# Altium PCB PCB1.PcbDoc
Units mil, origin at the board's own origin, x right, y up, seen from the top; angles counter-clockwise.
Board outline 3900 x 2800 mil, 2 copper layers (Top Layer, Bottom Layer), stack 65.792 mil thick; 55 components, 52 nets, 200 pads, 137 vias.
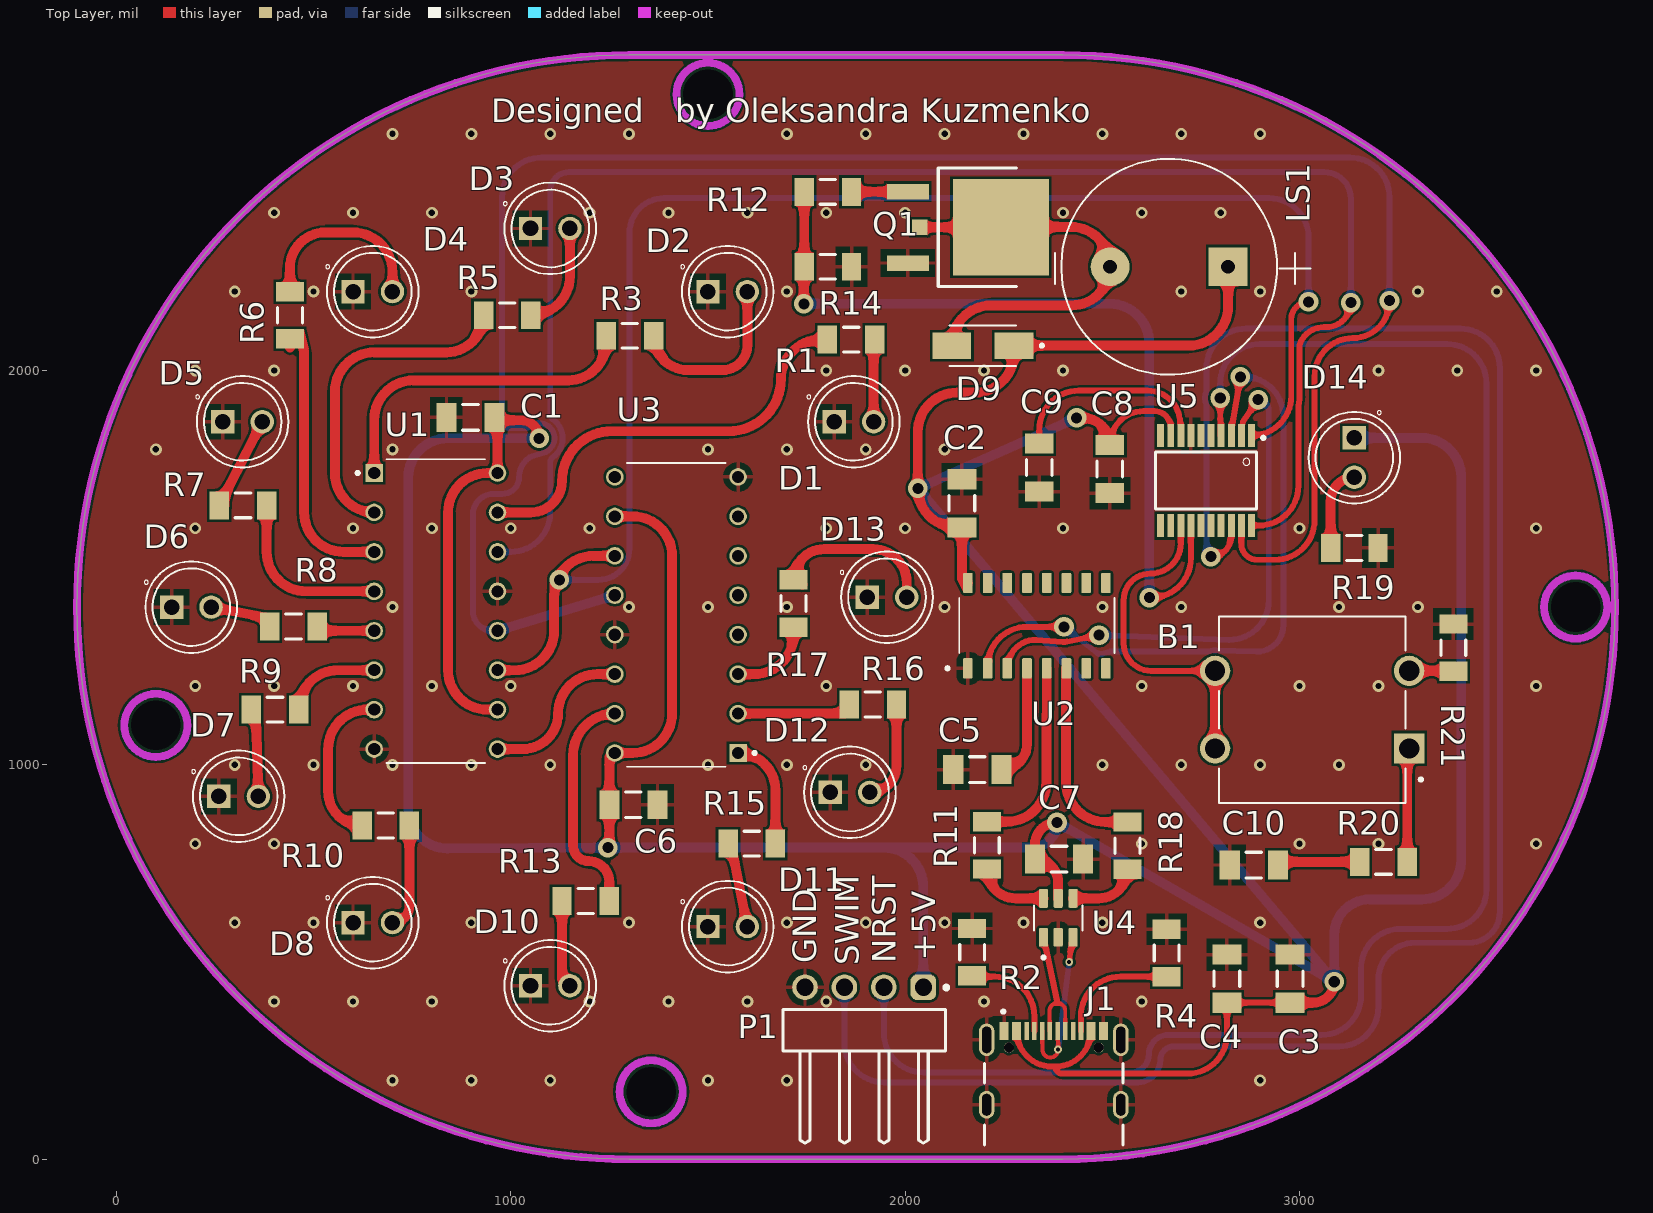
[diagram p0: Top Layer view]
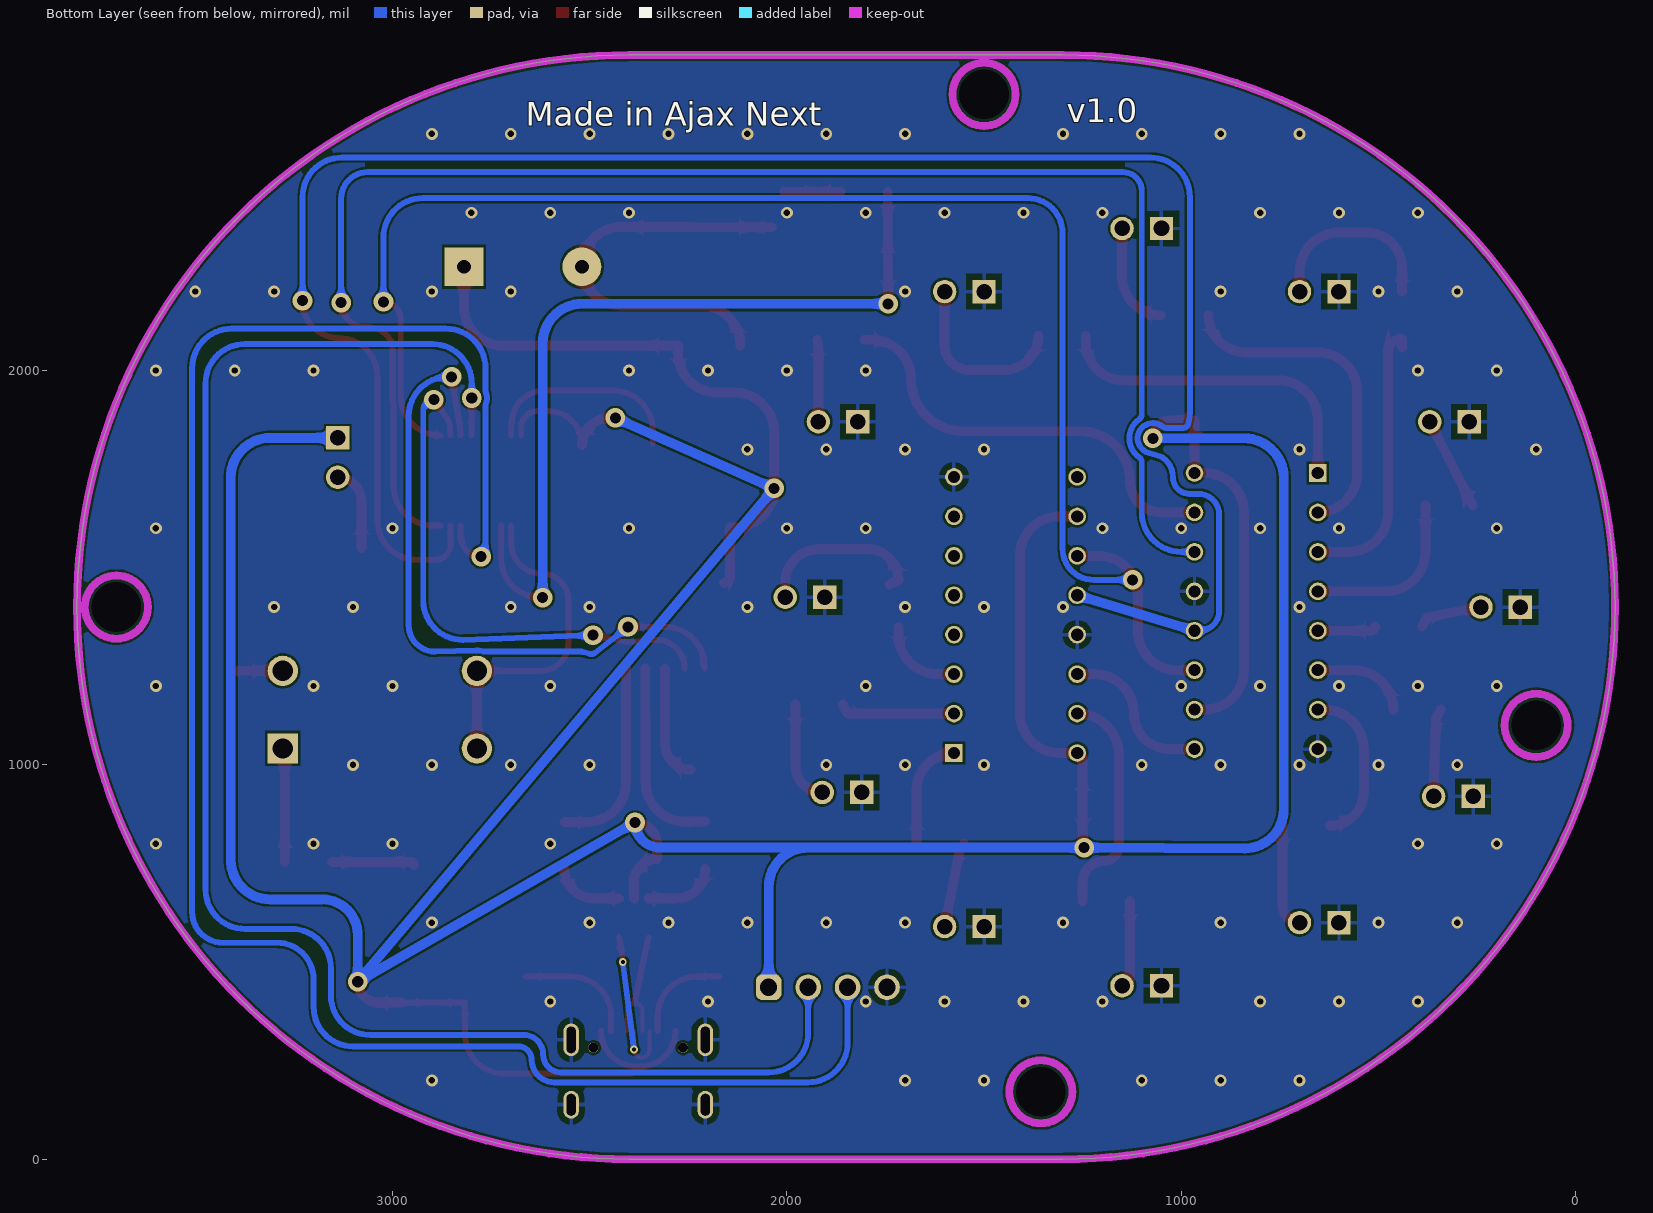
[diagram p1: Bottom Layer view, seen from below]
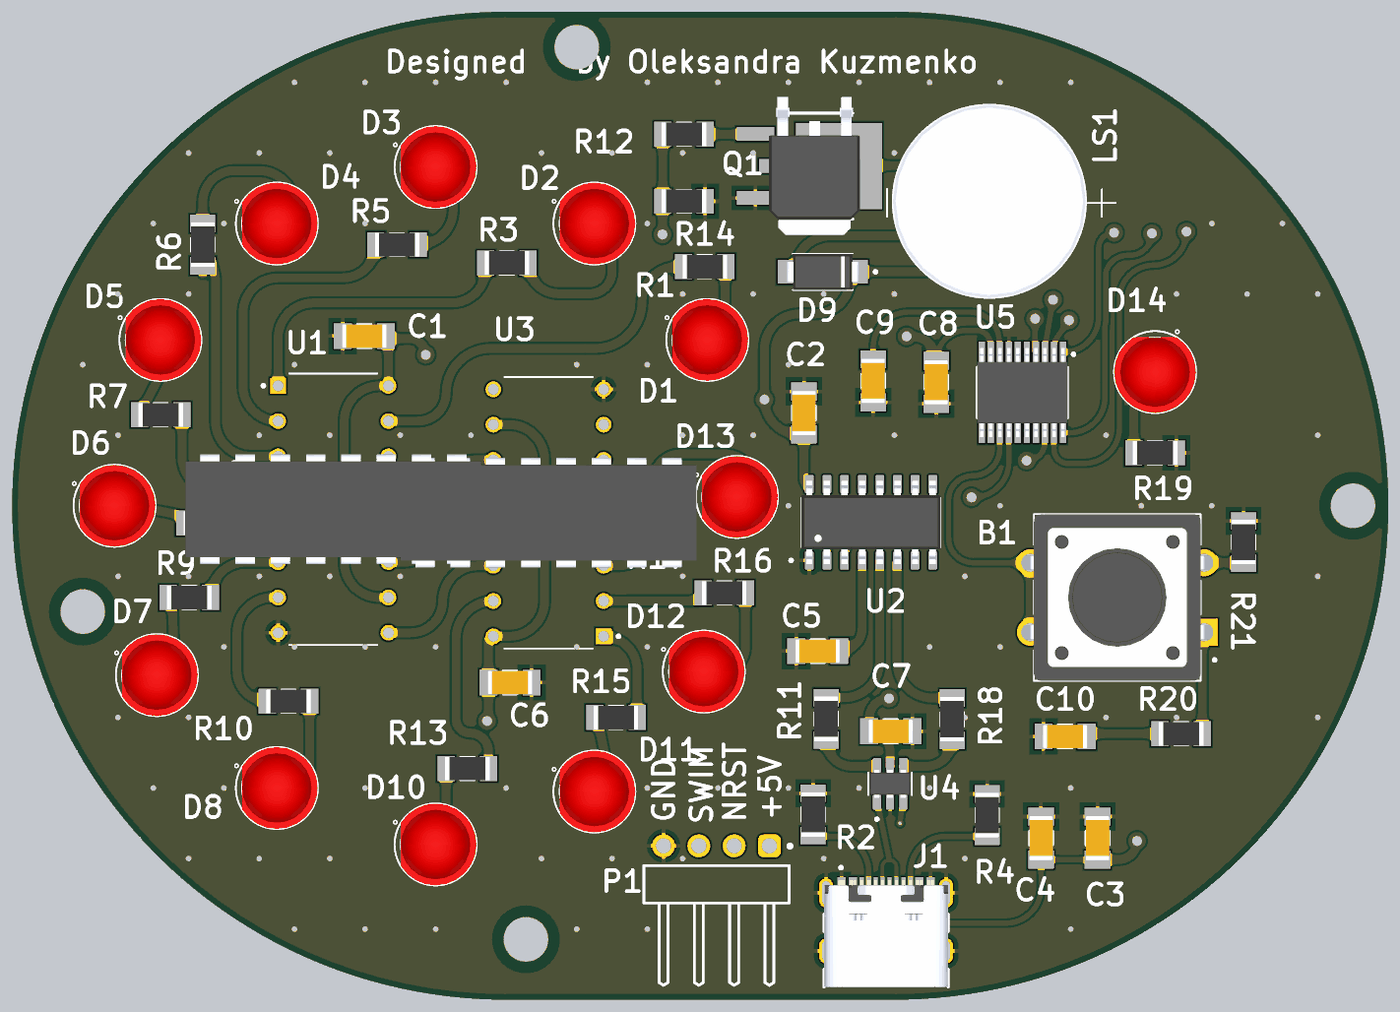
[diagram p2: 3D render of the assembled board from above, using the file's embedded part models]

## Layer stack, top to bottom
Top Solder: solder mask 0.4, Solder Resist, Dk 3.5
Top Layer: signal copper 1.4
Dielectric 1: dielectric 62.9921, FR-4, Dk 4.8
Bottom Layer: signal copper 1.4
Bottom Solder: solder mask 0.4, Solder Resist, Dk 3.5

## Board outline
1300,0 cw(c1300,1400) 1300,2800 2400,2800 cw(c2400,1400) 2400,0

## Design rules (kind name [scope] priority, off if disabled: settings)
Clearance [All] p1: gap=6 ignorepadtopadclearanceinfootprint=FALSE
DiffPairsRouting [All] p1: maxlimit=10 minlimit=10 mostfreqgap=10 toplayer_minwidth=15 toplayer_maxwidth=15 toplayer_prefwidth=15 bottomlayer_minwidth=15 bottomlayer_maxwidth=15 bottomlayer_prefwidth=15 maxuncoupledlength=500
HoleSize [All] p1: absolutevalues=TRUE maxlimit=200 minlimit=1 maxpercent=80.000 minpercent=20.000
MinimumSolderMaskSliver MinimumSolderMaskSliver_1 [HasFootprint('USB_Type_C') vs HasFootprint('USB_Type_C')] p1: minsoldermaskwidth=0
MinimumSolderMaskSliver [All] p2: minsoldermaskwidth=4
PolygonConnect [All] p1: connectstyle=Relief reliefconductorwidth=10 reliefentries=4 polygonreliefangle="90 Angle" airgapwidth=15
RoutingVias [All] p1: holewidth=28 width=50 viastyle="Through Hole" minholewidth=28 minwidth=50 maxholewidth=28 maxwidth=50
SilkToSilkClearance [All] p1: silktosilkclearance=6
SilkToSolderMaskClearance [IsPad] p1: minsilkscreentomaskgap=6 clearancetoexposedcopper=TRUE
SolderMaskExpansion [All] p1: expansion=4 istentingtop=FALSE
SupplyNets "Schematic Supply Nets_1" [InNet('+5V')] p1: voltage=0.000
SupplyNets "Schematic Supply Nets" [InNet('GND')] p2: voltage=0.000
Width [All] p1: maxlimit=100 minlimit=10 preferedwidth=50 minimp=50.000000 maximp=50.000000 favimp=50.000000
25 further rules are at their usual default settings.

## Classes and differential pairs
differential pair TypeC: +TypeC_P -TypeC_N
differential pair D: +D_P -D_N

## Components (designator, comment, footprint, x,y, rotation, side; value= is the part's Value field where it differs from the comment)
B1 "VS-1213-67-160GF" Button 3032,1140 r180 top
C1 "Cap_1206" Cap_1206 898,1881 r0 top value=100nF
C2 "Cap_1206" Cap_1206 2144,1663 r270 top value=100nF
C3 "Cap_1206" Cap_1206 2976,458 r270 top value=100nF
C4 "Cap_1206" Cap_1206 2816,458 r270 top value=1uF
C5 "Cap_1206" Cap_1206 2183,988 r0 top value=100nF
C6 "100nF" Cap_1206 1311,899 r180 top
C7 "Cap_1206" Cap_1206 2390,761 r180 top value=100nF
C8 "Cap_1206" Cap_1206 2519,1750 r90 top value=1uF
C9 "Cap_1206" Cap_1206 2340,1754 r90 top value=100nF
C10 "Cap_1206" Cap_1206 2884,746 r0 top value=100nF
D1 "Diode" Diode_Green 1870,1870 r0 top
D2 "Diode" Diode_Green 1550,2200 r0 top
D3 "Diode" Diode_Green 1100,2360 r0 top
D4 "Diode" Diode_Green 650,2200 r0 top
D5 "Diode" Diode_Green 320,1870 r0 top
D6 "Diode" Diode_Green 190,1400 r0 top
D7 "Diode" Diode_Green 310,920 r0 top
D8 "Diode" Diode_Green 650,600 r0 top
D9 "Diode standart" "Diode standart" 2197,2063 r180 top
D10 "Diode" Diode_Green 1100,440 r0 top
D11 "Diode" Diode_Green 1550,590 r0 top
D12 "Diode" Diode_Green 1860,930 r0 top
D13 "Diode" Diode_Green 1954,1425 r0 top
D14 "Diode" Diode_Green 3139,1779 r270 top
J1 "USB_Type_C" USB_Type_C 2376.78,138.12 r0 top
LS1 "Speaker" Speaker 2669.39,2263 r180 top
P1 "Conector_4pin" Conector_4pins 1896,327 r0 top
Q1 "IRLR2905TRPBF" IRLR2905TRPBF 2174,2363 r270 top
R1 "Res_1206" Res_1206 1863,2078 r0 top value=220Om
R2 "Res_1206" Res_1206 2170,525 r90 top value=5.1KOm
R3 "Res_1206" Res_1206 1302,2088 r0 top value=220Om
R4 "Res_1206" Res_1206 2663,523 r270 top value=5.1KOm
R5 "Res_1206" Res_1206 991,2140 r0 top value=220Om
R6 "Res_1206" Res_1206 440,2140 r90 top value=220Om
R7 "Res_1206" Res_1206 321,1658 r180 top value=220Om
R8 "Res_1206" Res_1206 449,1351 r180 top value=220Om
R9 "Res_1206" Res_1206 402,1140 r180 top value=220Om
R10 "Res_1206" Res_1206 683,846 r0 top value=220Om
R11 "Res_1206" Res_1206 2207,796 r270 top value=22Om
R12 "Res_1206" Res_1206 1804,2453 r180 top value=1KOmR12
R13 "Res_1206" Res_1206 1190,655 r180 top value=220Om
R14 "Res_1206" Res_1206 1804,2263 r180 top value=100KOm
R15 "Res_1206" Res_1206 1611,800 r180 top value=220Om
R16 "Res_1206" Res_1206 1918,1153 r0 top value=220Om
R17 "Res_1206" Res_1206 1717,1409 r90 top value=220Om
R18 "Res_1206" Res_1206 2564,795 r270 top value=22Om
R19 "Res_1206" Res_1206 3139,1550 r0 top value=2.2KOm
R20 "Res_1206" Res_1206 3213,754 r0 top value=10KOm
R21 "Res_1206" Res_1206 3390,1297 r270 top value=10KOm
U1 "SN74HC595N" SN74HC595N 810,1390 r0 top
U2 "CH340С" CH340С 2334,1353 r90 top
U3 "SN74HC595N" SN74HC595N 1420,1380 r180 top
U4 "USBLC6-2SC6" USBLC6-2SC6 2388,612 r90 top
U5 "STM8S103F3P6" SOP65P640X120-20N 2763,1721 r270 top

## Footprints (in the part's own frame and the unit in brackets; to place one, negate y for a bottom-side part, rotate by r counter-clockwise, add the part's x,y. Pads: shape width x height; smd on the part's side, far side on the other; paste and mask are expansions set on the pad)
Button [mm] "12*12mm"
  rect 1.95x1.95 / inner round 1.95 / far side rect 1.95x1.95 hole 1.3: 1(-6.25,2.5)
  round 1.95 hole 1.3: 2(-6.25,-2.5) 3(6.25,2.5) 4(6.25,-2.5)
  silkscreen extent -7.1,-6 6,6, body extent -7,-6 7,6, height 4.3
Cap_1206 [mm]
  rect 1.3x1.85 smd: 1(-1.55,0) 2(1.55,0)
  silkscreen extent -0.5,-0.82 0.5,0.82, body extent -1.6,-0.85 1.6,0.85, height 1.6
CH340С [mm]
  rrect25% 1.31x0.62 smd: 1(-2.75,4.445) 2(-2.75,3.175) 3(-2.75,1.905) 4(-2.75,0.635) 5(-2.75,-0.635) 6(-2.75,-1.905) 7(-2.75,-3.175) 8(-2.75,-4.445) 9(2.75,-4.445) 10(2.75,-3.175) 11(2.75,-1.905) 12(2.75,-0.635) 13(2.75,0.635) 14(2.75,1.905) 15(2.75,3.175) 16(2.75,4.445)
  silkscreen extent -2.85,-5 1.78,5.85, body extent -3,-5 3,5, height 1.8
Conector_4pins [mm]
  rrect50% 1.65x1.65 hole 1.1: 1(3.81,2.77)
  round 1.65 hole 1.1: 2(1.27,2.77) 3(-1.27,2.77) 4(-3.81,2.77)
  silkscreen extent -5.23,-7.27 5.42,2.87
"Diode standart" [mm]
  rect 2.5x1.7 smd: A(2,0) C(-2,0)
  silkscreen extent -3.9,-1.3 2.15,1.3, body extent -2.6,-1.3 2.6,1.3, height 2.4
Diode_Green [mm] "LED g"
  round 1.508 hole 1: A(1.27,0)
  rect 1.508x1.508 / inner round 1.508 / far side rect 1.508x1.508 hole 1: C(-1.27,0)
  silkscreen extent -3.03,-2.95 2.95,2.95, body extent -2.5,-2.95 2.95,2.95, height 9.6
IRLR2905TRPBF [mm]
  rect 1x2.7 smd: 1(-2.3,-4.25) 3(2.3,-4.25)
  rect 1x1.02 smd: 2(0,-3.48)
  rect 6.2x6.2 smd: PAD(0,1.75)
  silkscreen extent -3.81,-2.29 3.81,2.75, body extent -4.95,-3.27 4.95,3.27, height 2.39
Res_1206 [mm] "Chip Resistor, 2-Leads, Body 3.10x1.60mm, IPC Low Density"
  rect 1.25x1.8 smd: 1(-1.525,0) 2(1.525,0)
  silkscreen extent -0.5,-0.8 0.5,0.8, body extent -1.6,-0.85 1.6,0.85, height 0.6
SN74HC595N [mm]
  rect 1.13x1.13 / inner round 1.13 / far side rect 1.13x1.13 hole 0.78: 1(-3.97,8.89)
  round 1.13 hole 0.78: 2(-3.97,6.35) 3(-3.97,3.81) 4(-3.97,1.27) 5(-3.97,-1.27) 6(-3.97,-3.81) 7(-3.97,-6.35) 8(-3.97,-8.89) 9(3.97,-8.89) 10(3.97,-6.35) 11(3.97,-3.81) 12(3.97,-1.27) 13(3.97,1.27) 14(3.97,3.81) 15(3.97,6.35) 16(3.97,8.89)
  silkscreen extent -5.13,-9.77 3.17,9.77, body extent -3.95,-10.67 3.95,10.67, height 5.33
SOP65P640X120-20N [mm]
  rect 1.5x0.45 smd: 1(-2.9,2.925) 2(-2.9,2.275) 3(-2.9,1.625) 4(-2.9,0.975) 5(-2.9,0.325) 6(-2.9,-0.325) 7(-2.9,-0.975) 8(-2.9,-1.625) 9(-2.9,-2.275) 10(-2.9,-2.925) 11(2.9,-2.925) 12(2.9,-2.275) 13(2.9,-1.625) 14(2.9,-0.975) 15(2.9,-0.325) 16(2.9,0.325) 17(2.9,0.975) 18(2.9,1.625) 19(2.9,2.275) 20(2.9,2.925)
  silkscreen extent -2.85,-3.25 1.83,3.78, body extent -3.2,-3.25 3.2,3.25, height 1.29
Speaker [mm]
  round 2.5 hole 0.9: N(3.8,0)
  rect 2.5x2.5 / inner round 2.5 / far side rect 2.5x2.5 hole 0.9: P(-3.8,0)
  silkscreen extent -9.09,-6.95 7.37,6.95, body extent -6.95,-6.95 6.95,6.95, height 7.5
USB_Type_C [mm]
  rect 0.6x1.15 smd mask+0.05: A1_B12(-3.2,4.755) A4_B9(-2.4,4.755) B1_A12(3.2,4.755) B4_A9(2.4,4.755)
  rect 0.3x1.15 smd mask+0.05: A5(-1.25,4.755) A6(-0.25,4.755) A7(0.25,4.755) A8(1.25,4.755) B5(1.75,4.755) B6(0.75,4.755) B7(-0.75,4.755) B8(-1.75,4.755)
  oval 1x2.1 hole 0.6 slot 1.7 at 90 deg: SH1(-4.32,4.18) SH2(4.32,4.18)
  oval 1x1.8 hole 0.6 slot 1.4 at 90 deg: SH3(-4.32,0) SH4(4.32,0)
  round 0.65 hole 0.65 unplated: ""(-2.89,3.68) ""(2.89,3.68)
  silkscreen extent -4.47,-2.6 4.47,6.1, body extent -4.47,-2.6 4.47,5.11, height 3.31
USBLC6-2SC6 [mm]
  rrect25% 1.21x0.59 smd: 1(-1.255,0.95) 2(-1.255,0) 3(-1.255,-0.95) 4(1.255,-0.95) 5(1.255,0) 6(1.255,0.95)
  silkscreen extent -2.65,-1.57 0.81,1.57, body extent -1.4,-1.46 1.4,1.46, height 0.4

## Part data
B1: "Button 12*12mm"
C6: library part Cap_1206

## Free pads (board coordinates)
  round 0 hole 125.98: 7(100,1100) 7(1356,171) 7(1500,2700) 7(3700,1400)

## Via types
v1: diameter 30, hole 16, Top Layer to Bottom Layer, tented both sides, 117 vias
v2: diameter 50, hole 28, Top Layer to Bottom Layer, tented both sides, 18 vias
v3: diameter 20, hole 10, Top Layer to Bottom Layer, tented both sides, 2 vias

## Nets (pads, with @x,y where several pads share a name; then routed paths per layer and width w, separated by ;. In a path a pad name is that pad's centre, name@x,y a point inside that pad or via, vN(x,y) a via of type N, cw(c..) or ccw(c..) an arc to the next point about the centre after c; other vN are vias at no path point)
1-3: U1.9 U3.14 | length 405.9
  Top Layer w25: U1.9 1030,1040 ccw(c1030,1130) 1120,1130 cw(c1220,1130) 1220,1230 U3.14
+5V: C1.2 C2.2 C3.2 C4.2 C6.2 C7.2 C8.2 D9.C D14.C J1.A4_B9 J1.B4_A9 LS1.P P1.1 U1.10 U1.16 U2.16 U3.10 U3.16 U4.5 U5.9 | length 13544.8
  Top Layer w15: J1.A4_B9 ccw(c2372.61,325.32) 2372.61,235 2380.94,235 ; J1.B4_A9 cw(c2380.94,325.32) 2380.94,235 ; C8.2 cw(c2604.98,1811.02) 2604.98,1897 2632,1897 cw(c2632,1855.57) 2673.43,1855.57 U5.9 ; C3.2 C4.2 2816,317 cw(c2716,317) 2716,217 2398.94,217 cw(c2398.94,235) 2380.94,235
  Top Layer w25: U1.10 941,1140 cw(c941,1240) 841,1240 841,1640 cw(c941,1640) 941,1740 U1.16 966.3,1873.72 1026.28,1873.72 cw(c1026.28,1828) v2(1072,1828) ; v2(1246,790) ccw(c1246,793.98) 1249.98,793.98 C6.2 1249.98,1016.28 cw(c1263.7,1016.28) U3.16 1309,1030 ccw(c1309,1130) 1409,1130 1409,1530 ccw(c1309,1530) 1309,1630 U3.10 ; U2.16 cw(c2159,1476.27) 2144,1476.27 C2.2 2131.02,1601.98 cw(c2131.02,1701) v2(2032,1701) 2032,1844 cw(c2132,1844) 2132,1944 2177,1944 ccw(c2177,2042.74) 2275.74,2042.74 D9.C 2719,2063 ccw(c2719,2163) 2819,2163 LS1.P ; v2(2385,854) ccw(c2385,797.98) 2328.98,797.98 C7.2 cw(c2328.98,701.98) 2388,701.98 U4.5 ; v2(2435,1880) 2450.02,1880 cw(c2450.02,1811.02) C8.2 ; C3.2 3034.98,396.98 ccw(c3034.98,450) v2(3088,450)
  Bottom Layer w25: v2(1072,1828) 840,1828 ccw(c840,1728) 740,1728 740,888 ccw(c840,888) 839.92,788 ccw(c840,888) 840,788 v2(1246,790) 1946,790 ; P1.1 2046,690 ccw(c1946,690) 1946,790 ; v2(2435,1880) v2(2032,1701) v2(3088,450) ; D14.C 3310,1829 cw(c3310,1729) 3410,1729 3410,759 cw(c3310,759) 3310,659 3178,659 ccw(c3178,569) 3088,569 v2(3088,450) ; 1946,790 2321,790 ccw(c2321,854) v2(2385,854) v2(3088,450)
C3: B1.3 B1.4 U5.13 | length 850.1
  Top Layer w15: U5.13 2699.02,1562.02 cw(c2622,1562.02) 2622,1485 ccw(c2622,1417) 2554,1417 2554,1308 ccw(c2623.57,1308) 2623.57,1238.43 B1.4
  Top Layer w25: B1.3 B1.4
C4: R12.2 R14.2 U5.14 | length 2108.1
  Top Layer w15: v2(2619,1424) 2624.61,1424 ccw(c2624.61,1524) 2724.61,1524 U5.14
  Top Layer w25: v2(1743,2169) 1743,2262.04 cw(c1743.96,2262.04) R14.2 R12.2
  Bottom Layer w25: v2(1743,2169) 2519,2169 cw(c2519,2069) 2619,2069 v2(2619,1424)
D2: U1.12 U3.12 U5.19 | length 5303.3
  Top Layer w15: U5.19 2852.57,1559.43 ccw(c2892,1559.43) 2892,1520 2938,1520 ccw(c2938,1620) 3038,1620 3038,1985 cw(c3135,1985) 3135,2082 ccw(c3135,2175) 3228,2175 v2(3228,2177) v2@3228,2176
  Bottom Layer w15: U1.12 954,1340 cw(c954,1390) 904,1390 904,1635 cw(c956,1635) 956,1687 979.27,1687 ccw(c979.27,1728.73) 1021,1728.73 cw(c1083.54,1728.73) 1045.72,1778.54 cw(c1054.77,1766.58) 1050.3,1780.9 1083.54,1791.27 ccw(c1072,1828) 1047.24,1857.48 cw(c1037.63,1869) 1037.69,1854 996.4,1854 cw(c996.46,1869) 982.09,1864.69 cw(c1078,1893) 978,1893 978,2440 cw(c1078,2440) 1078,2540 3128,2540 cw(c3128,2440) 3228,2440 v2(3228,2177)
  Bottom Layer w25: U1.12 U3.12
D3: U1.14 U5.20 | length 4108.5
  Top Layer w15: U5.20@2880,1604.98 ccw(c2878.16,1604.98) U5.20 2897,1606.83 ccw(c2897,1706.83) 2997,1706.83 2997,1906.82 cw(c3012,1906.77) 2997.32,1909.85 ccw(c2879,1935.17) 3000,1935.17 3000,2062.11 cw(c3015,2062.06) 3000.88,2067.12 cw(c3062,2045) 3062,2110 3068,2110 ccw(c3068,2172) v2(3130,2172)
  Bottom Layer w15: U1.14 1000,1540 ccw(c1000,1640) 1100,1640 1100,1767.16 cw(c1115,1767.16) 1106.33,1779.4 ccw(c1072,1828) 1106.32,1876.61 cw(c1115,1888.84) 1100,1888.84 1100,2455 cw(c1148,2455) 1148,2503 3063,2503 cw(c3063,2436) 3130,2436 v2(3130,2172)
D4: U1.11 U3.11 U5.1 | length 3939.8
  Top Layer w15: U5.1 2879,1835.17 ccw(c2879,1935.17) 2979,1935.17 2979,2130 cw(c3023,2130) v2(3023,2174)
  Top Layer w25: U1.11 1010,1240 ccw(c1010,1340) 1110,1340 1110,1430 cw(c1210,1430) 1210,1530 U3.11
  Bottom Layer w15: v2(1123,1469) 1222,1469 ccw(c1222,1548) 1301,1548 1301,2349 cw(c1389,2349) 1389,2437 2923,2437 cw(c2923,2337) 3023,2337 v2(3023,2174)
D_N: R18.1 U2.6 | length 503.3
  Top Layer w25: U2.6 ccw(c2409,1243.73) 2408,1243.73 2408,955.04 ccw(c2508,955.04) 2508,855.04 R18.1
D_P: R11.1 U2.5 | length 496.8
  Top Layer w25: R11.1 2258,856.04 ccw(c2258,956.04) 2358,956.04 2358,1038.49 2358.91,1226.44 U2.5
GND: C1.1 C2.1 C3.1 C4.1 C5.1 C6.1 C7.1 C8.1 C9.1 C10.1 D1.C D2.C D3.C D4.C D5.C D6.C D7.C D8.C D10.C D11.C D12.C D13.C J1.A1_B12 J1.B1_A12 J1.SH1 J1.SH2 J1.SH3 J1.SH4 P1.4 Q1.3 R2.2 R4.1 R14.1 R19.2 R21.1 U1.8 U1.13 U2.1 U3.8 U3.13 U4.2 U5.7
  other v1: 700,200 900,200 1100,200 1500,200 1700,200 2900,200 400,400 600,400 800,400 1200,400 1400,400 1600,400 1800,400 2200,400 2600,400 300,600 500,600 900,600 1300,600 1700,600 1900,600 2100,600 2300,600 2500,600 2900,600 200,800 400,800 2600,800 3000,800 3200,800 3600,800 300,1000 500,1000 700,1000 900,1000 1100,1000 1500,1000 1700,1000 1900,1000 2500,1000 2700,1000 2900,1000 3100,1000 200,1200 400,1200 600,1200 800,1200 1000,1200 1800,1200 2600,1200 3000,1200 3200,1200 3600,1200 700,1400 1300,1400 1500,1400 1700,1400 2100,1400 2500,1400 2700,1400 3100,1400 3300,1400 200,1600 600,1600 800,1600 1000,1600 1200,1600 1800,1600 2000,1600 2400,1600 3000,1600 3600,1600 100,1800 700,1800 1500,1800 1700,1800 1900,1800 2100,1800 200,2000 400,2000 1800,2000 2000,2000 2200,2000 2400,2000 3200,2000 3400,2000 3600,2000 300,2200 500,2200 900,2200 1700,2200 2700,2200 2900,2200 3300,2200 3500,2200 400,2400 600,2400 800,2400 1200,2400 1400,2400 1600,2400 1800,2400 2000,2400 2400,2400 2600,2400 2800,2400 700,2600 900,2600 1100,2600 1300,2600 1700,2600 1900,2600 2100,2600 2300,2600 2500,2600 2700,2600 2900,2600
NetB1_1: B1.1 R20.2 | length 290.4
  Top Layer w25: R20.2 3273.04,1036.55 cw(c3278.06,1036.55) B1.1
NetB1_2: B1.2 R21.2 | length 112.8
  Top Layer w25: B1.2 3388.54,1238.43 cw(c3388.54,1236.96) R21.2
NetC5_2: C5.2 U2.4 | length 293.8
  Top Layer w25: C5.2 ccw(c2244.02,1052.98) 2309,1052.98 U2.4
NetC9_2: C9.2 U5.8 | length 527.8
  Top Layer w15: C9.2 2340,1849 cw(c2440,1849) 2440,1949 2615,1949 cw(c2615,1867) 2697,1867 cw(c2697,1864.98) 2699.02,1864.98 U5.8
NetC10_2: C10.2 R20.1 | length 212.5
  Top Layer w25: C10.2 cw(c2953.02,746) 2953.02,754 R20.1
NetD1_A: D1.A R1.2 | length 208.2
  Top Layer w25: D1.A 1920,2055.07 R1.2
NetD2_A: D2.A R3.2 | length 459.6
  Top Layer w25: R3.2 ccw(c1449.04,2088) 1449.04,2001 1537,2001 ccw(c1537,2064) 1600,2064 D2.A
NetD3_A: D3.A R5.2 | length 276.5
  Top Layer w25: R5.2 ccw(c1051.04,2238.96) 1150,2238.96 D3.A
NetD4_A: D4.A R6.2 | length 483.1
  Top Layer w25: R6.2 440,2260 cw(c530,2260) 530,2350 600,2350 cw(c600,2250) 700,2250 D4.A cw(c700,2202.96) D4.A@697.04,2202.96
NetD5_A: D5.A R7.2 | length 238.4
  Top Layer w25: R7.2 273.07,1680.93 D5.A
NetD6_A: D6.A R8.2 | length 165.2
  Top Layer w25: D6.A 376.85,1373.93 R8.2
NetD7_A: D7.A R9.2 | length 223.1
  Top Layer w25: R9.2 354.07,1117.07 D7.A
NetD8_A: D8.A R10.2 | length 270.6
  Top Layer w25: D8.A ccw(c700,643.04) 743.04,643.04 R10.2
NetD9_A: D9.A LS1.N Q1.2 Q1.PAD | length 1058
  Top Layer w25: Q1.2 2241.1,2363 ccw(c2241.1,2363.9) 2242,2363.9 2242,2364 2419.79,2364 cw(c2419.79,2264) 2519.79,2264 LS1.N cw(c2421.79,2263) 2421.79,2165 2218.26,2165 ccw(c2218.26,2065) 2118.26,2065 D9.A
NetD10_A: D10.A R13.2 | length 226.4
  Top Layer w25: R13.2 1129.96,460.04 ccw(c1150,460.04) D10.A
NetD11_A: D11.A R15.2 | length 216.6
  Top Layer w25: R15.2 1563.07,777.07 D11.A
NetD12_A: D12.A R16.2 | length 261.8
  Top Layer w25: D12.A ccw(c1910,998.04) 1978.04,998.04 R16.2
NetD13_A: D13.A R17.2 | length 442.9
  Top Layer w25: R17.2@1739.93,1456.93 R17.2 cw(c1794.96,1469.04) 1794.96,1547 1919,1547 cw(c1919,1462) 2004,1462 D13.A
NetD14_A: D14.A R19.1 | length 213.3
  Top Layer w25: R19.1 3078.96,1668.96 cw(c3139,1668.96) D14.A
NetJ1_A5: J1.A5 R2.1 | length 250.3
  Top Layer w15: R2.1@2172,462.96 2227.57,462.96 cw(c2227.57,362.96) 2327.57,362.96 J1.A5
NetJ1_B5: J1.B5 R4.2 | length 312
  Top Layer w15: J1.B5 2445.68,362.96 cw(c2545.68,362.96) 2545.68,462.96 R4.2
NetQ1_1: Q1.1 R12.1 | length 143.7
  Top Layer w25: R12.1@1864.04,2453.55 R12.1 2006.68,2453 Q1.1
NetR1_1: R1.1 U1.15 | length 1086.7
  Top Layer w25: U1.15 1050,1640 ccw(c1050,1720) 1130,1720 cw(c1256,1720) 1256,1846 1553,1846 ccw(c1553,1978) 1685,1978 cw(c1785,1978) 1785,2078 R1.1
NetR3_1: R3.1 U1.1 | length 852.2
  Top Layer w25: U1.1 653.7,1875 cw(c753.7,1875) 753.7,1975 1146,1975 ccw(c1146,2070.96) 1241.96,2070.96 R3.1
NetR5_1: R5.1 U1.2 | length 850.6
  Top Layer w25: U1.2 cw(c653.7,1739.7) 554,1739.7 554,1946 cw(c654,1946) 654,2046 836.96,2046 ccw(c836.96,2140) R5.1
NetR6_1: R6.1 U1.3 | length 718.2
  Top Layer w25: R6.1@440,2058 R6.1 ; R6.1@440,2079 R6.1 ; U1.3 576,1540 cw(c576,1640) 476,1640 476,2043.96 ccw(c440,2043.96) R6.1
NetR7_1: R7.1 U1.4 | length 447.7
  Top Layer w25: R7.1 381.04,1540 ccw(c481.04,1540) 481.04,1440 U1.4
NetR8_1: R8.1 U1.5 | length 150.9
  Top Layer w25: R8.1 ccw(c520.04,1351) 520.04,1340 U1.5
NetR9_1: R9.1 U1.6 | length 248.7
  Top Layer w25: R9.1 cw(c562.04,1140) 562.04,1240 U1.6
NetR10_1: R10.1 U1.7 | length 416.8
  Top Layer w25: R10.1 cw(c622.96,931.96) 537,931.96 537,1040 cw(c637,1040) 637,1140 U1.7
NetR11_2: R11.2 U4.6 | length 186.6
  Top Layer w25: R11.2 2207,735 ccw(c2280.59,735) 2280.59,661.41 U4.6
NetR13_1: R13.1 U3.15 | length 587.9
  Top Layer w25: R13.1 1250.04,702.96 ccw(c1197,702.96) 1197,756 cw(c1197,795) 1158,795 1158,1024.3 cw(c1263.7,1024.3) U3.15
NetR15_1: R15.1 U3.1 | length 284.1
  Top Layer w25: U3.1 cw(c1576.3,935.26) 1671.04,935.26 R15.1
NetR16_1: R16.1 U3.2 | length 295.5
  Top Layer w25: U3.2 1845.85,1130.07 R16.1
NetR17_1: R17.1 U3.3 | length 216.7
  Top Layer w25: U3.3 1617,1230 ccw(c1617,1330) 1717,1330 R17.1
NetR18_2: R18.2 U4.4 | length 180.6
  Top Layer w25: U4.4 2490.45,661.41 ccw(c2490.45,734.96) R18.2
NRST: P1.2 U5.4 | length 4200.9
  Top Layer w15: v2(2799,1930) 2799,1837.56 ccw(c2801.39,1837.56) U5.4
  Bottom Layer w15: P1.2 1946,320 ccw(c2046,320) 2046,220 2572,220 ccw(c2572,266) 2618,266 cw(c2667,266) 2667,315 3056,315 ccw(c3056,415) 3156,415 3156,484 cw(c3256,484) 3256,584 3374,584 ccw(c3374,684) 3474,684 3474,1967 ccw(c3374,1967) 3374,2067 2899,2067 ccw(c2899,1967) 2799,1967 v2(2799,1930)
RX: U2.2 U5.3 | length 1741
  Top Layer w15: U2.2@2213.7,1263.02 U2.2 2209,1250 cw(c2309,1250) 2309,1350 v2(2403,1350) ; U5.3 2828.33,1857.2 v2(2850,1984)
  Bottom Layer w15: v2(2403,1350) 2485.74,1284.3 ccw(c2495.03,1296.07) 2498.69,1281.53 2498.74,1281.54 2518.29,1286.53 cw(c2522,1272) 2522,1287 2765.21,1287 ccw(c2765.15,1302) 2769.77,1287.73 cw(c2785.94,1238.43) 2787.68,1290.28 2891.53,1287.01 ccw(c2892,1302) 2892,1287 ccw(c2892,1354) 2959,1354 2959,1884 ccw(c2859,1884) 2859,1984 v2(2850,1984)
SWIM: P1.3 U5.18 | length 4986.4
  Top Layer w15: v2(2775,1528) ccw(c2775,1579.98) 2826.98,1579.98 U5.18 U5.18@2826.98,1587.98
  Bottom Layer w15: P1.3 1846,295 ccw(c1946,295) 1946,195 2590,195 ccw(c2590,252) 2647,252 cw(c2681,252) 2681,286 3100,286 ccw(c3100,386) 3200,386 3200,456 cw(c3293,456) 3293,549 3430,549 ccw(c3430,627) 3508,627 3508,2006 ccw(c3408,2006) 3408,2106 2864,2106 ccw(c2864,2006) 2764,2006 2764,1949.03 cw(c2749,1949.03) 2763.03,1943.72 ccw(c2799,1930) 2763.02,1916.29 cw(c2749,1910.97) 2764,1910.97 2764,1539 ccw(c2775,1539) v2(2775,1528)
TX: U2.3 U5.2 | length 1390.9
  Top Layer w15: U2.3 cw(c2331.27,1244.73) 2331.27,1317 cw(c2331.27,1302) 2332.45,1316.95 2399.97,1311.62 ccw(c2403,1350) 2410.77,1312.29 v2(2491.46,1328.91) ; U5.2 2853.93,1857.2 2856.09,1867.48 cw(c2869.3,1864.7) 2858.17,1872.34 v2(2895,1926)
  Bottom Layer w15: v2(2491.46,1328.91) 2821.46,1317.01 ccw(c2822,1332) 2822,1317 ccw(c2822,1417) 2922,1417 2922,1899 ccw(c2895,1899) v2(2895,1926)
TypeC_N: J1.A7 J1.B7 U4.3 | length 444.6
  Top Layer w10: J1.B7@2348,325.32 2348,278 ccw(c2368,278) v3(2388,278) J1.A7@2388,325.32
  Top Layer w15: v3(2416,500) 2421.29,546.27 U4.3
  Bottom Layer w15: v3(2388,278) v3(2416,500)
TypeC_P: J1.A6 J1.B6 U4.1 | length 334.5
  Top Layer w10: J1.A6@2366,325.32 2366,376 cw(c2386,376) 2406,376 J1.B6@2406,325.32
  Top Layer w15: U4.1 2354.71,546.27 2386,396
pads on no net: J1. J1.A8 J1.B8 U2.7 U2.8 U2.9 U2.10 U2.11 U2.12 U2.13 U2.14 U2.15 U3.4 U3.5 U3.6 U3.7 U3.9 U5.5 U5.6 U5.10 U5.11 U5.12 U5.15 U5.16 U5.17

## Polygon pours and split planes (outlines as drawn)
GND on Top Layer "GND_L01_P003" (solid, remove dead copper, pour order 3): 1300,0 cw(c1300,1400) 1300,2800 2400,2800 cw(c2400,1400) 2400,0
GND on Bottom Layer "GND_L02_P004" (solid, remove dead copper, pour order 4): 1300,0 cw(c1300,1400) 1300,2800 2400,2800 cw(c2400,1400) 2400,0

## Keep-outs
Keep-Out Layer:
  circle w19.68: c1500,2700 r80
  circle w19.68: c1356,171 r80
  circle w19.68: c3700,1400 r80
  circle w19.68: c100,1100 r80
  lines w19.68: 1300,0 cw(c1300,1400) 1300,2800 2400,2800 cw(c2400,1400) 2400,0 1300,0

## Silkscreen, mask and mechanical layers (free items; w line width, h text height)
Top Overlay:
  text "Designed   by Oleksandra Kuzmenko" at 950,2629.99 h60
  text "+5V" at 2076,503 h60 r90
  text "GND" at 1775,497 h60 r90
  text "NRST" at 1976,497 h60 r90
  text "SWIM" at 1882,492 h60 r90
Bottom Overlay:
  text "v1.0" at 1290,2630 h60
  text "Made in Ajax Next" at 2662.54,2620.68 h60
Mechanical 1:
  lines w10: 1300,0 cw(c1300,1400) 1300,2800 ; 1300,0 cw(c1300,1400) 1300,2800 ; 1300,0 2400,0 ; 1300,0 2400,0 ; 1300,2800 2400,2800 ; 1300,2800 2400,2800 ; 2400,0 ccw(c2400,1400) 2400,2800 ; 2400,0 ccw(c2400,1400) 2400,2800